# Altium PCB Pcb_Sensores.PcbDoc
Units mm, origin at the board's own origin, x right, y up, seen from the top; angles counter-clockwise.
Board outline 47.95 x 21.75 mm, 2 copper layers (Top Layer, Bottom Layer); 11 components, 6 nets, 36 pads, 0 vias.
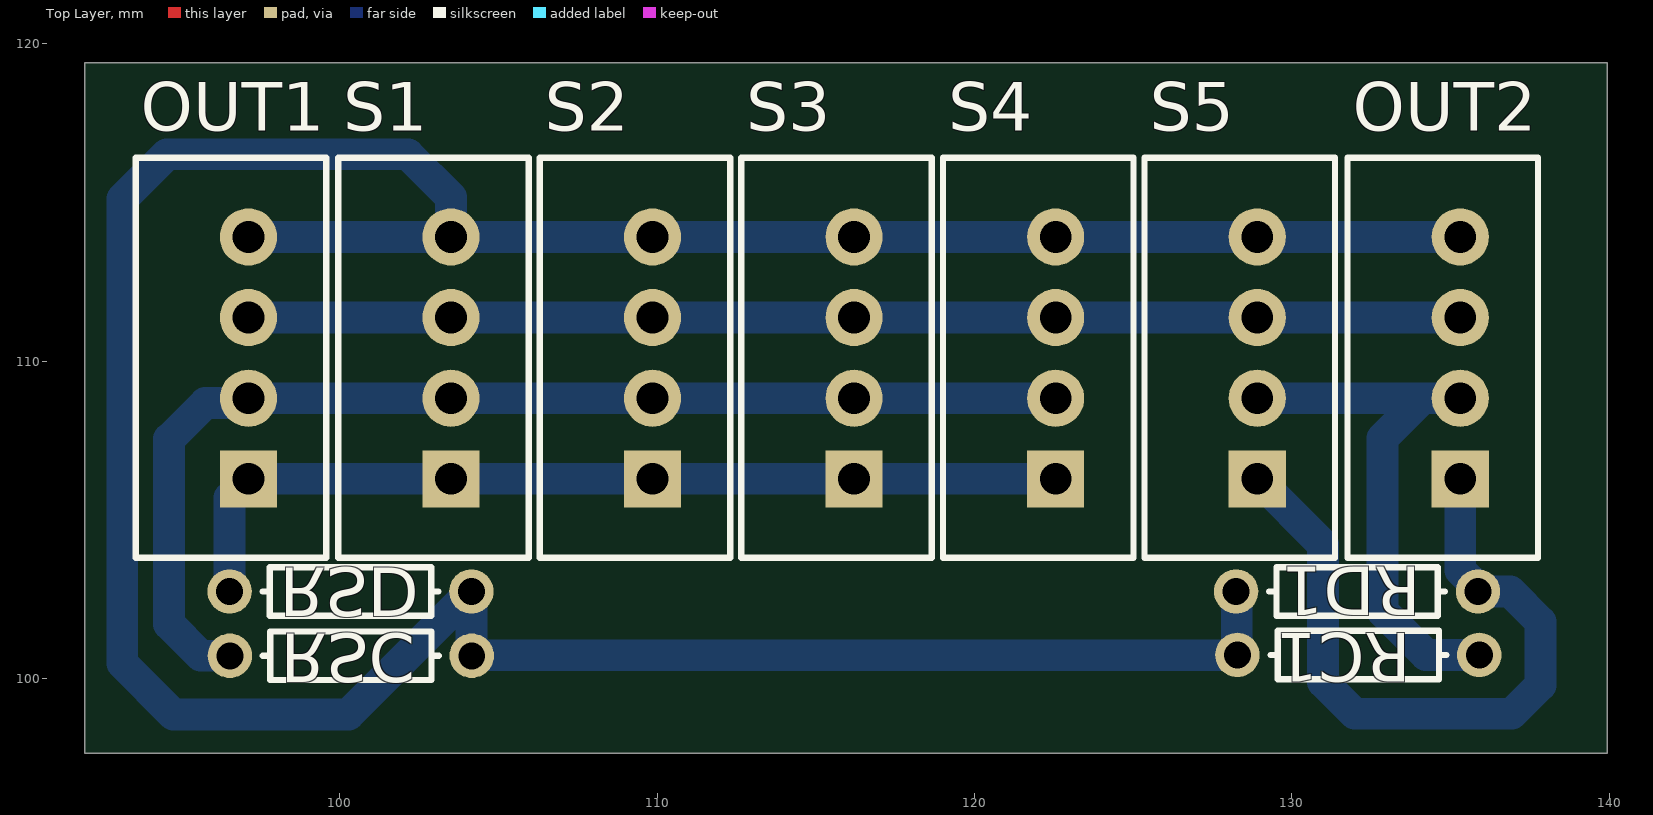
[diagram p0: Top Layer view]
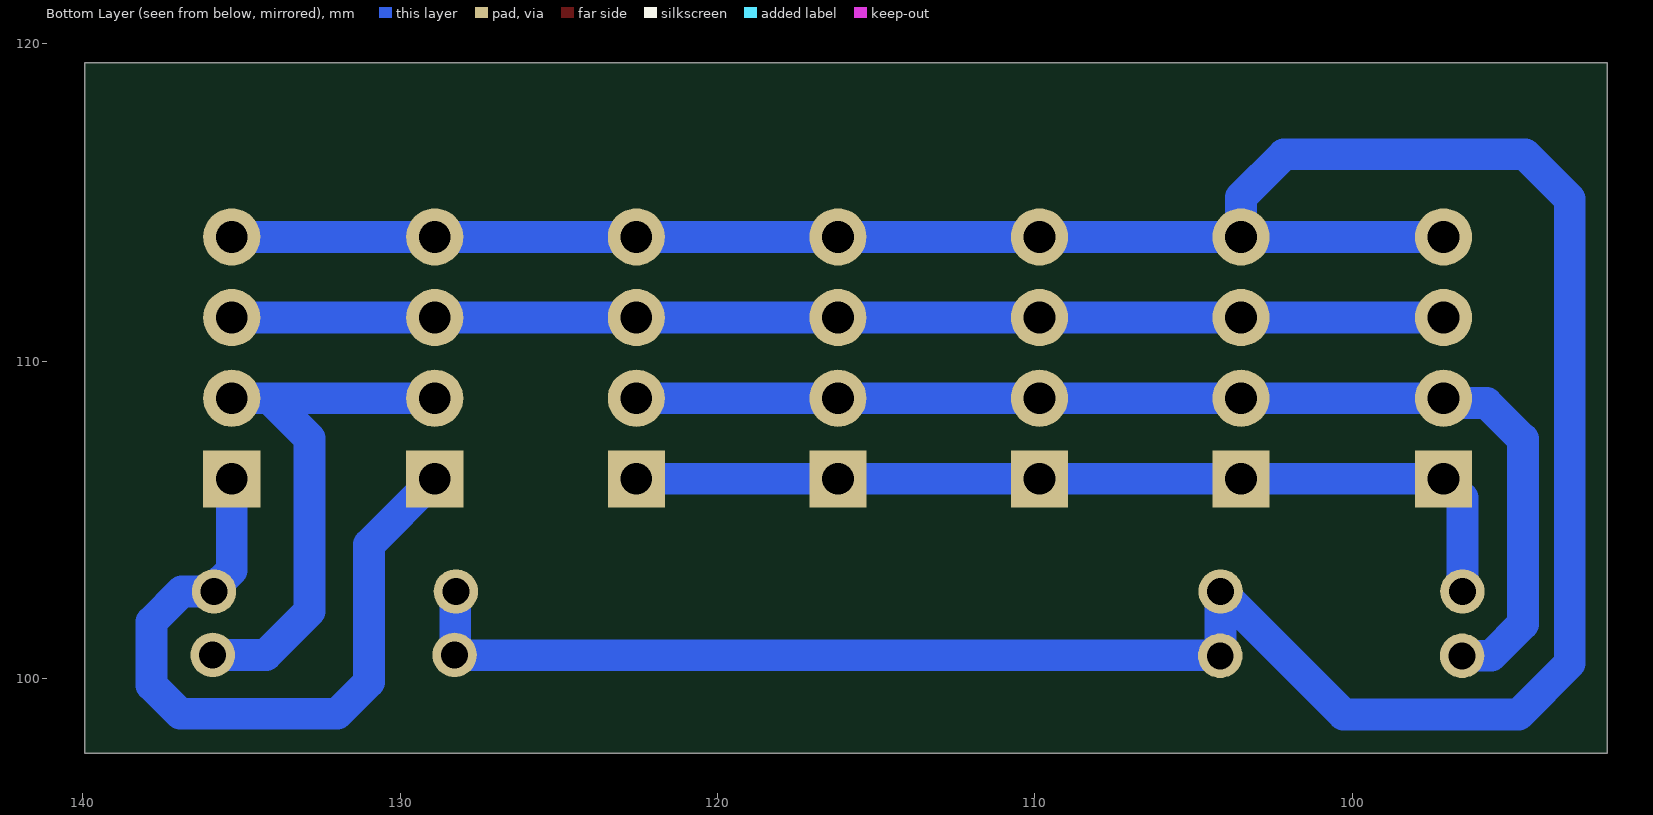
[diagram p1: Bottom Layer view, seen from below]
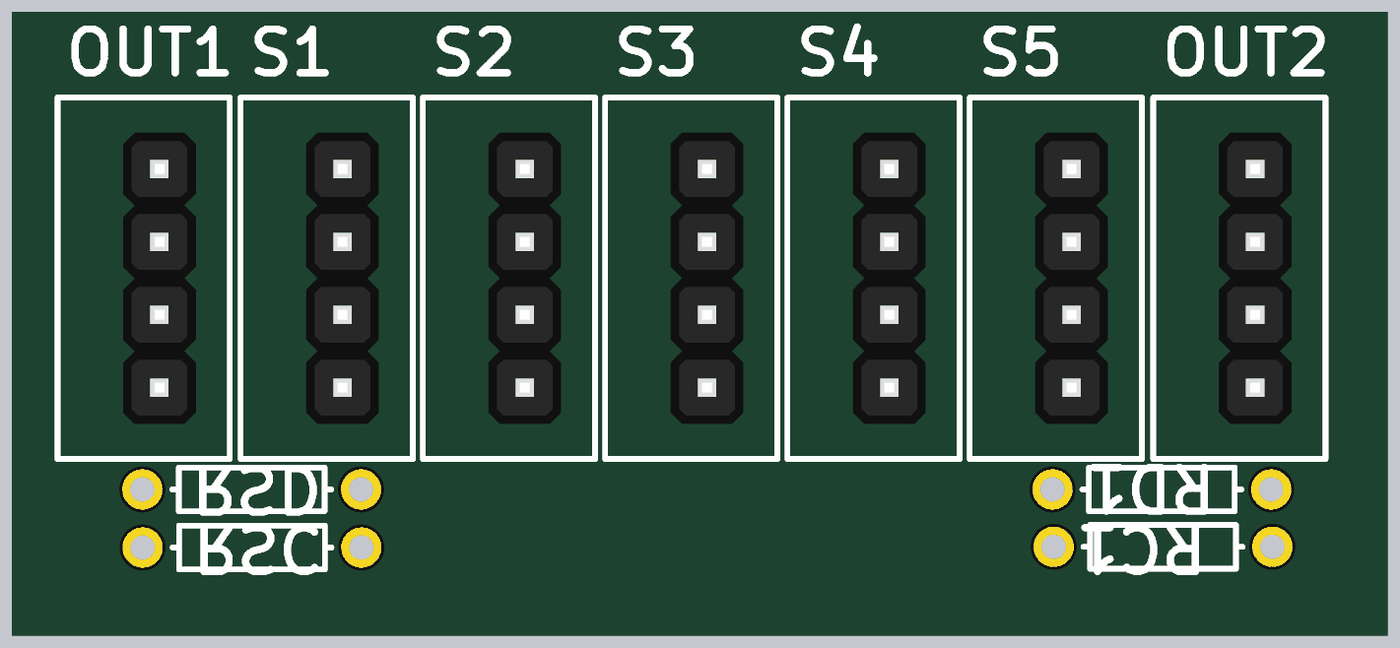
[diagram p2: 3D render of the assembled board from above, using the file's embedded part models]

## Layer stack, top to bottom
Top Solder: solder mask 0.0102, Solder Resist, Dk 3.5
Top Layer: signal copper 0.0356
Dielectric 1: dielectric 0.32, FR-4, Dk 4.8
Bottom Layer: signal copper 0.0356
Bottom Solder: solder mask 0.0102, Solder Resist, Dk 3.5

## Board outline
91.975,97.65 91.975,119.4 139.925,119.4 139.925,97.65

## Design rules (kind name [scope] priority, off if disabled: settings)
Clearance [All] p1: gap=0.254 ignorepadtopadclearanceinfootprint=FALSE except(0: Arc-Hole Track-Hole SMDPad-Hole THPad-Hole Via-Hole Fill-Hole Poly-Hole Region-Hole Text-Hole)
PolygonConnect [All] p1: connectstyle=Relief reliefconductorwidth=0.254 reliefentries=4 polygonreliefangle="90 Angle" airgapwidth=0.254
RoutingVias [All] p1: holewidth=0.711 width=1.27 viastyle="Through Hole" minholewidth=0.711 minwidth=1.27 maxholewidth=0.711 maxwidth=1.27
SolderMaskExpansion [All] p1: expansion=0.102
Width [All] p1: maxlimit=3 minlimit=0.5 preferedwidth=1 minimp=50.000000 maximp=50.000000 favimp=50.000000
30 further rules are at their usual default settings.

## Components (designator, comment, footprint, x,y, rotation, side; value= is the part's Value field where it differs from the comment)
OUT1 "Connector" "1x4x2.54 Pin Header TH V" 97.125,110.109 r90 top
OUT2 "Connector" "1x4x2.54 Pin Header TH V" 135.3,110.109 r90 top
RC1 "Res1" AXIAL-0.3 132.09,100.75 r180 top value=1K
RD1 "Res1" AXIAL-0.3 132.05,102.75 r180 top value=1K
RSC "Res1" AXIAL-0.3 100.35,100.725 r0 top value=1K
RSD "Res1" AXIAL-0.3 100.34,102.75 r0 top value=1K
S1 "Connector" "1x4x2.54 Pin Header TH V" 103.505,110.109 r90 top
S2 "Connector" "1x4x2.54 Pin Header TH V" 109.855,110.109 r90 top
S3 "Connector" "1x4x2.54 Pin Header TH V" 116.205,110.109 r90 top
S4 "Connector" "1x4x2.54 Pin Header TH V" 122.555,110.109 r90 top
S5 "Connector" "1x4x2.54 Pin Header TH V" 128.905,110.109 r90 top

## Footprints (in the part's own frame and the unit in brackets; to place one, negate y for a bottom-side part, rotate by r counter-clockwise, add the part's x,y. Pads: shape width x height; smd on the part's side, far side on the other; paste and mask are expansions set on the pad)
"1x4x2.54 Pin Header TH V" [mm] "1x4x2.54 Pin Header TH V"
  rect 1.8x1.8 hole 1: 1(-3.81,0)
  round 1.8 hole 1: 2(-1.27,0) 3(1.27,0) 4(3.81,0)
  silkscreen extent -6.3,-2.45 6.3,3.55, body extent -5.08,-1.27 5.08,1.27, height 8.55
AXIAL-0.3 [mm] "Axial Device, Thru-Hole; 2 Leads; 0.3 in Pin Spacing"
  round 1.4 hole 0.85: 1(-3.81,0) 2(3.81,0)
  silkscreen extent -2.77,-0.76 2.77,0.76

## Part data
OUT1 OUT2 S1 S2 S3 S4 S5: library part "Header 1x4"
RC1 RD1 RSC RSD: "Resistor", LatestRevisionDate=17-Jul-2002, LatestRevisionNote="Re-released for DXP Platform.", PackageDescription="Axial Device, Thru-Hole; 2 Leads; 0.3 in Pin Spacing", PackageReference=AXIAL-0.3, Published=8-Jun-2000, Publisher="Altium Limited"

## Nets (pads, with @x,y where several pads share a name; then routed paths per layer and width w, separated by ;. In a path a pad name is that pad's centre, name@x,y a point inside that pad or via, vN(x,y) a via of type N, cw(c..) or ccw(c..) an arc to the next point about the centre after c; other vN are vias at no path point)
GND: OUT1.3 OUT2.3 S1.3 S2.3 S3.3 S4.3 S5.3 | length 38.2
  Bottom Layer w1: OUT1.3 S1.3 S2.3 S3.3 S4.3 S5.3 OUT2.3
SCL: OUT1.2 RSC.1 S1.2 S2.2 S3.2 S4.2 | length 36.6
  Bottom Layer w1: RSC.1 95.625,100.725 94.625,101.725 94.625,107.55 95.761,108.686 96.972,108.686 OUT1.2 S1.2 S2.2 S3.2 S4.2
SCL1: OUT2.2 RC1.1 S5.2 | length 17.3
  Bottom Layer w1: S5.2 134.114,108.839 ; OUT2.2 134.114,108.839 ; RC1.1 134.225,100.75 132.85,102.125 132.85,107.575 134.114,108.839
SDA: OUT1.1 RSD.1 S1.1 S2.1 S3.1 S4.1 | length 29.2
  Bottom Layer w1: RSD.1 96.53,105.704 OUT1.1 S1.1 S2.1 S3.1 S4.1
SDA1: OUT2.1 RD1.1 S5.1 | length 23
  Bottom Layer w1: S5.1 130.975,104.229 130.975,99.9 131.975,98.9 136.925,98.9 137.825,99.8 137.825,101.8 136.875,102.75 RD1.1 135.86,102.858 135.3,103.418 OUT2.1
VCC: OUT1.4 OUT2.4 RC1.2 RD1.2 RSC.2 RSD.2 S1.4 S2.4 S3.4 S4.4 S5.4 | length 107
  Bottom Layer w1: OUT1.4 S1.4 ; RD1.2 128.26,102.73 128.26,100.77 RC1.2 128.268,100.738 104.173,100.738 RSC.2 104.155,100.73 104.155,102.745 RSD.2 100.275,98.875 94.761,98.875 93.15,100.486 93.15,115.114 94.561,116.525 102.15,116.525 103.505,115.17 S1.4 ; OUT2.4 S5.4 S4.4 S3.4 S2.4 S1.4

## Silkscreen, mask and mechanical layers (free items; w line width, h text height)
Mechanical 1:
  lines w0.254: 91.975,97.65 139.925,97.65 139.925,119.4 91.975,119.4 91.975,99.55 91.975,97.65